# Allegro board RCTransponder-10.brd
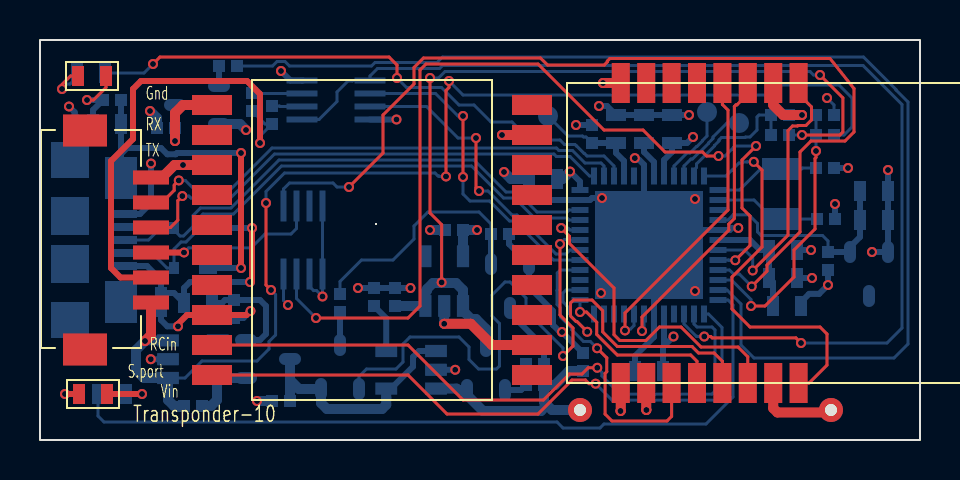
[diagram p0: board, top side]
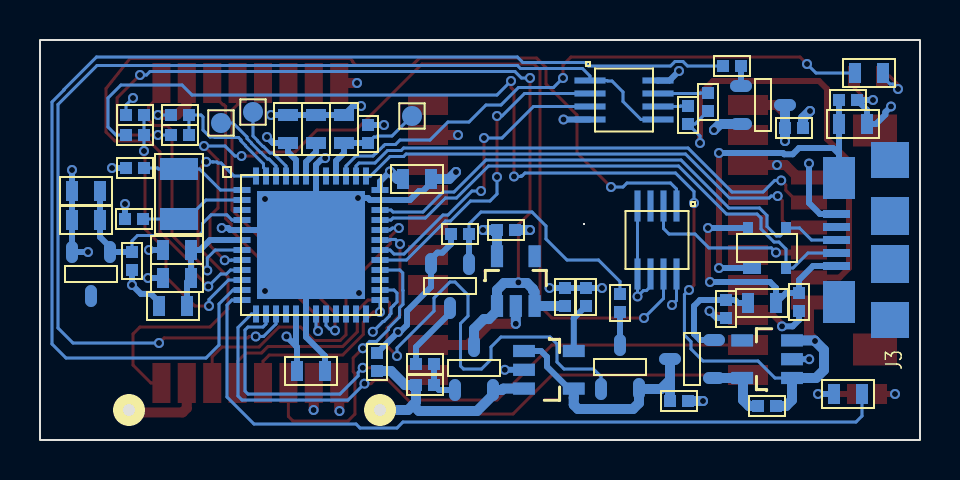
[diagram p1: board, bottom side, seen from below]

Outline 44 x 20 mm; copper layers: TOP, INNER_LAYER_2, INNER_LAYER_3, BOTTOM. Coordinates in mm from the lower left corner of the outline.
Outline path: rectangle 0,0 44,20

## Design rules (mm)
constraint set DEFAULT: min track width 0.15
net group DP1: nets USB_N USB_P

## Placement (name value [footprint] x y rotation side)
C1  1uF/10V  [R_0402]  12.05 1.95 0 bottom
C2  20pF  [R_0402]  39.25 13.6 0 bottom
C3  1uF/10V  [R_0402]  27.15 3.9 270 bottom
C4  10uF/6V3  [R_0402]  20.7 10.5 0 bottom
C5  20pF  [R_0402]  39.3 11.05 0 bottom
C6  10uF/6V3  [R_0402]  17.75 7.15 270 bottom
C7  100nF  [R_0603]  41.7 11 180 bottom
C8  4.7uF  [R_0603]  41.7 12.45 180 bottom
C9  100nF  [R_0603]  30.45 3.45 0 bottom
C10  100nF  [R_0603]  25.15 13.05 0 bottom
C11  100nF  [R_0603]  30.2 15.55 270 bottom
C12  100nF  [R_0603]  37.15 9.5 180 bottom
C13  4.7uF  [R_0603]  37.15 8.1 180 bottom
C14  100nF / 10V  [R_0402]  6.3 15.6 0 bottom
C15  1nF  [R_0402]  9.7 6.55 90 bottom
C16  1nF  [R_0402]  6.05 6.9 90 bottom
C17  100nF  [R_0603]  31.6 15.55 270 bottom
C18  100nF  [R_0603]  28.8 15.55 270 bottom
C19  4.7nF / 1kV  [R_0603]  3.35 15.8 0 bottom
D1  BAT54C  [R_SOT23_123]  11.4 4.05 180 bottom
D2  BAT54C  [R_SOT23_123]  15 3.65 270 bottom
D3  LM4040D30IDBZTG4  [R_SOT23]  41.45 8.3 90 bottom
D4  LSQ976-Z  [R_0603]  2.65 2.3 180 top
D5  PRTR5V0U2X  [R_SOT143B]  7.65 9.6 180 bottom
D7  VLMG1300-GS08  [R_0603]  2.6 18.2 0 top
FB1  470R@100MHz  [R_0603]  37.35 6.7 180 bottom
FB2  BLM18PG471SN1D  [R_0603]  7.9 6.85 0 bottom
J1  6x1_1.25mm DF13 connector  [R_CONN_DF13A-6P-1_25H]  2.85 10 90 top
J2  E28-2G4M20S  [R_RFE28-2G4M20S]  39.6 10.35 90 top
J3  ZX62-AB-5PA(31)  [R_USB-ZX62-AB-5PA_31_]  1.5 10 90 bottom
J4  PA6H  [R_GPS_PA6H]  16.6 10 0 top
Q1  RZR040P01  [R_SOT23]  22.3 3.6 270 bottom
Q2  NTR4003NT3G  [R_SOT23]  23.5 7.7 90 bottom
Q3  RZR040P01  [R_SOT23]  7.85 16.75 0 bottom
R1  N.M.  [R_0402]  7.65 1.7 0 bottom
R2  10k  [R_0402]  24.75 2.75 0 bottom
R3  20k  [R_0402]  16.7 7.15 270 bottom
R4  10k  [R_0402]  24.75 3.8 0 bottom
R5  10k  [R_0402]  15 6.85 90 bottom
R6  1k  [R_0402]  39.4 8.95 270 bottom
R7  10k  [R_0402]  23 10.3 0 bottom
R8  100k  [R_0402]  39.25 15.25 180 bottom
R9  100k  [R_0402]  37 15.25 180 bottom
R10  100k  [R_0402]  37 16.25 0 bottom
R11  100k  [R_0402]  39.25 16.25 0 bottom
R13  1k3  [R_0603]  3.6 2.3 180 bottom
R15  10k  [R_0402]  9.4 18.7 0 bottom
R16  10k  [R_0402]  27.6 15.3 90 bottom
R17  1M  [R_0402]  3.6 17 0 bottom
R18  1k  [R_0402]  10.6 16.9 270 bottom
R19  1k  [R_0402]  11.6 16.25 270 bottom
R20  1k3  [R_0603]  2.55 18.35 0 bottom
RESET  RESET  [R_1MM_TESTPOINT]  25.4 16.2 180 bottom
SWCLK  SWCLK  [R_1MM_TESTPOINT]  33.35 16.4 180 bottom
SWDIO  SWDIO  [R_1MM_TESTPOINT]  34.95 15.85 180 bottom
U1  MCP73812  [R_SOT23-5PIN]  19.8 4.45 270 bottom
U2  REG102NA-5  [R_SOT23-5PIN]  6.4 3.1 90 bottom
U3  MIC5504-3.3  [R_SOT23-5PIN]  21.15 6.7 180 bottom
U4  ATSAMD21G18A-48  [R_QFN48_7X7MM]  30.45 9.75 180 bottom
U6  SN74LVC2G86DCTR  [R_PDSO-G8]  13.15 10 270 bottom
U7  SN74LVC2G86DCTR  [R_PDSO-G8]  14.8 17 180 bottom
UNK+  Vbat+  [TESTPIN-0_6MM]  27 1.5 180 bottom
UNK-  Vbat-  [TESTPIN-0_6MM]  39.55 1.5 180 bottom
Y1  32.768kHz  [R_XTAL-ABS07]  37.05 12.3 90 bottom

## Library data of the parts
C1 C3 C4 C6-C14 C17-C19 = CAP NP_0: room: P25
C2 C5 C15 C16 = Cap 0402: room: ATMEL
D1 D2 = BAT54C: room: serial3
D3 = LM4040A41IDBZ_0
D4 D7 = LM4040A41IDBZ_1
D5 = TVS_SRV_1: room: USB
FB1 FB2 = FERRITE_chip_0: room: ATMEL
J1 = CON3_19: room: COMPORT
J2 = RJ11_30
J3 = USB_CON_3: room: USB
J4 = RJ11_22
Q1 Q3 = P_MOSFET_SOT223_1: room: PWR
Q2 = STB4NK60ZT4_2: room: POVP
R1-R11 R13 R15-R20 = R2: room: serial3
RESET SWCLK SWDIO UNK+ UNK- = TP_0
U1 = MIC4680_9: room: P25
U2 U3 = MIC4680_4: room: P25
U4 = AT91SAM4E-BGA144_6
U6 U7 = MIC4680_15: room: P25
Y1 = CRYSTAL/SM: room: ATMEL

## Footprints (pads in the part's own frame, mm; a bottom-side part is the same pattern mirrored in y, then rotated)
R_1MM_TESTPOINT
  round 1 smd: 1(0,0)
R_0402
  rect 0.6x0.6 smd: 1(-0.45,0) 2(0.45,0)
R_0603
  rect 0.6x1 smd: 1(-0.7,0) 2(0.7,0)
R_CONN_DF13A-6P-1_25H
  rect 0.7x1.8 smd: 1(-3.125,-2.7) 2(-1.875,-2.7) 3(-0.625,-2.7) 4(0.625,-2.7) 5(1.875,-2.7) 6(3.125,-2.7)
  rect 1.6x2.2 smd: 7(-5.475,0.6) 8(5.475,0.6)
R_GPS_PA6H
  round 0.1 hole 3: (0.2,0.8)
  rect 2x1 smd: 1(-8,6.75) 2(-8,5.25) 3(-8,3.75) 4(-8,2.25) 5(-8,0.75) 6(-8,-0.75) 7(-8,-2.25) 8(-8,-3.75) 9(-8,-5.25) 10(-8,-6.75) 11(8,-6.75) 12(8,-5.25) 13(8,-3.75) 14(8,-2.25) 15(8,-0.75) 16(8,0.75) 17(8,2.25) 18(8,3.75) 19(8,5.25) 20(8,6.75)
R_PDSO-G8
  rect 1.55x0.3 smd: 1(-1.7,0.975) 2(-1.7,0.325) 3(-1.7,-0.325) 4(-1.7,-0.975) 5(1.7,-0.975) 6(1.7,-0.325) 7(1.7,0.325) 8(1.7,0.975)
R_QFN48_7X7MM
  rect 0.85x0.3 smd: 1(-3.45,2.75) 2(-3.45,2.25) 3(-3.45,1.75) 4(-3.45,1.25) 5(-3.45,0.75) 6(-3.45,0.25) 7(-3.45,-0.25) 8(-3.45,-0.75) 9(-3.45,-1.25) 10(-3.45,-1.75) 11(-3.45,-2.25) 12(-3.45,-2.75) 25(3.45,-2.75) 26(3.45,-2.25) 27(3.45,-1.75) 28(3.45,-1.25) 29(3.45,-0.75) 30(3.45,-0.25) 31(3.45,0.25) 32(3.45,0.75) 33(3.45,1.25) 34(3.45,1.75) 35(3.45,2.25) 36(3.45,2.75)
  rect 0.3x0.85 smd: 13(-2.75,-3.45) 14(-2.25,-3.45) 15(-1.75,-3.45) 16(-1.25,-3.45) 17(-0.75,-3.45) 18(-0.25,-3.45) 19(0.25,-3.45) 20(0.75,-3.45) 21(1.25,-3.45) 22(1.75,-3.45) 23(2.25,-3.45) 24(2.75,-3.45) 37(2.75,3.45) 38(2.25,3.45) 39(1.75,3.45) 40(1.25,3.45) 41(0.75,3.45) 42(0.25,3.45) 43(-0.25,3.45) 44(-0.75,3.45) 45(-1.25,3.45) 46(-1.75,3.45) 47(-2.25,3.45) 48(-2.75,3.45)
  rect 5.4x5.4 smd: 49(0,0)
R_RFE28-2G4M20S
  rect 2x0.9 smd: 1(-7.5,10.56) 2(-7.5,9.29) 3(-7.5,8.02) 4(-7.5,6.75) 5(-7.5,5.48) 6(-7.5,4.21) 7(-7.5,2.94) 8(-7.5,1.67) 9(7.5,1.67) 10(7.5,2.94) 11(7.5,4.21) 12(7.5,5.48) 13(7.5,6.75) 14(7.5,8.02) 15(7.5,9.29) 16(7.5,10.56)
R_SOT23
  oval 1.1x0.6 smd: 1(1.1,-0.95) 2(1.1,0.95) 3(-1.1,0)
R_SOT23-5PIN
  rect 0.61x1.092 smd: 1(0,0) 2(0.94,0) 3(1.88,0) 4(1.88,2.489) 5(0,2.489)
R_SOT23_123
  oval 1.1x0.6 smd: 1(1.1,-0.95) 2(1.1,0.95) 3(-1.1,0)
R_SOT143B
  rect 0.9x0.6 smd: 1(-0.75,-1)
  rect 0.5x0.6 smd: 2(0.95,-1) 3(0.95,1) 4(-0.95,1)
R_USB-ZX62-AB-5PA_31_
  rect 0.4x1.35 smd: 1(-1.3,2.675) 2(-0.65,2.675) 3(0,2.675) 4(0.65,2.675) 5(1.3,2.675)
  rect 2.1x1.6 smd: 6(3.1,2.55) 7(-3.1,2.55)
  rect 1.9x1.9 smd: 8(1.2,0) 9(-1.2,0)
  rect 1.8x1.9 smd: 10(-4,0) 11(4,0)
R_XTAL-ABS07
  rect 1.1x1.9 smd: 1(-1.25,0) 2(1.25,0)
TESTPIN-0_6MM
  round 1.2 hole 0.6: 1(0,0)

## Nets
4V7: C1.2 D1.3 D2.2(C2) U1.1 U1.4(VDD)
+3.3V: C4.2 C9.2 C10.2 C17.2 FB1.1 J2.1(VCC) Q3.2(S) R6.2 R16.2 U3.5(VOUT) U4.17 U4.36(VDDIO2) U4.44 U6.8(VCC) U7.8(VCC)
GND: C1.1 C2.2 C3.1 C4.1 C5.2 C6.1 C7.1 C8.1 C9.1 C10.1 C11.1 C12.1 C13.1 C14.1 C15.1 C16.1 C17.1 C18.1 C19.1 D3.2 D4.2(CATHODE) D7.2(CATHODE) J1.6 J2.2 J2.7 J2.10 J2.16 J3.5 J4.3 J4.8 J4.12 J4.19 Q2.2(S) R3.1 R7.2 R10.2 R11.2 R17.1 U1.2 U2.2 U3.2 U4.5 U4.18 U4.35 U4.42 U4.49 U6.4 U6.5 U6.6 U7.4 UNK-.1
VIN: J1.1 R1.1 R8.1 U2.1 U2.3
VIN_50P: R8.2 R11.1 U4.10
AUX_RX: J1.5 U4.38
AUX_TX: J1.4 U4.37
BUSY: J2.12 U4.20
FRSKY_INVERT: U4.15 U7.1 U7.5
FRSKY_RCIN: J1.3 U6.2
FRSKY_SMART_PORT: J1.2 R18.2 R19.2
FRSKY_SMART_PORT_RX: U4.30 U7.3
FRSKY_SMART_PORT_TX: U4.29 U7.2
GPS_RX: J4.10 U4.13
GPS_TX: J4.9 U4.14
LED1: R20.2 U4.39
LED2: R13.2 U4.12
MISO: J2.3 U4.28
MOSI: J2.4 U4.25
NRESET: J2.11 U4.19
NSS: J2.6 U4.32
POWER_GPS: R15.2 U4.11
POWER_ON: D2.1 U4.31
RCIN: U4.8 U6.7
RESET: C18.2 R16.1 RESET.1 U4.40
RX_EN: J2.8 U4.48
SBUS_INVERT: U4.9 U6.1
SCK: J2.5 U4.26
TX_EN: J2.9 U4.7
USB_N: D5.2 J3.2 U4.33
USB_P: D5.3 J3.3 U4.34
VGPS: C14.2 J4.1(VCC) Q3.3
VLION: C6.2 Q1.3 R9.1 U3.1 U3.3
VREFA: C7.2 C8.2 D3.1(CATHODE) R6.1 U4.4
VUSB: C15.2 D1.2(C2) FB2.2
XIN32: C2.1 U4.1 Y1.2
XOUT32: C5.1 U4.2 Y1.1
N17065478: C11.2 U4.43
N17065885: C12.2 C13.2 FB1.2 U4.6
N17069937: C16.2 D5.4(VCC) FB2.1 J3.1(VBUS)
N17070561: C19.2 D5.1 J3.6 R17.2
N17071719: C3.2 Q1.2(S) R2.2 U1.3 UNK+.1
N17071775: R3.2 U1.5
N17071786: Q1.1 R2.1 R4.1
N17071891: D2.3 R5.1
N17071893: Q2.1 R5.2 R7.1
N17073887: D1.1 R1.2 U2.5(VOUT)
N17081259: Q3.1 R15.1
N17089733: R9.2 R10.1 U4.47
N17092983: D4.1 R13.1
N17093743: SWDIO.1 U4.46
N17093750: SWCLK.1 U4.45
N17097944: R18.1 U7.7
N17097957: R19.1 U7.6
N17102064: D7.1 R20.1
N170718061: Q2.3 R4.2

Pads without a net: D3 3; J1 7 8; J2 13 14 15; J3 4 7 8 9 10 11; J4 2 4 5 6 7 11 13 14 15 16 17 18 20; U2 4; U3 4; U4 3 16 21 22 23 24 27 41; U6 3

## Via types
v1: diameter 0.5, hole 0.3, TOP to BOTTOM, 96 vias

## Routing (per net, layer and track width the routed paths; a pad name or vN(x,y) marks a point on that pad's centre or on a via; arc(x,y) is an arc through that point)
4V7: length 12.4
  BOTTOM w0.3: U1.4 17.55,2.57 18.65,3.67 18.65,4.15 18.95,4.45 U1.1
  BOTTOM w0.5: 12.5,3 C1.2 ; 12.5,3 12.95,2.55 D2.2 14.05,1.85 14.35,1.55 17.1,1.55 17.31,1.76 17.31,2.11 17.31,2.12 U1.4 ; 12.5,3 D1.3
+3.3V: length 19.8
  TOP w0.3: 29.04,2.9 J2.1
  TOP w0.5: J2.1 29.04,1.47 v1(29.02,1.45)
  BOTTOM w0.15: v1(12.4,6.75) 12.18,6.97 U6.8
  BOTTOM w0.3: v1(12.05,18.45) 12.53,17.98 U7.8 13.15,17.98 ; R16.2 v1(26.8,15.75) ; 31.2,4.7 U4.17 ; 31.2,4.7 v1(31.68,5.17) ; 31.2,4.7 31.15,4.65 C9.2 ; FB1.1 38.05,6.9 38.46,7.31 38.96,7.31 v1(39.4,7.75) R6.2 ; U4.44 31.2,14 31.6,14.4 C17.2 32.35,14.85 v1(32.65,15.15) ; v1(26.5,13.42) 27,12.92 U4.36
  BOTTOM w0.5: v1(26.5,13.42) 26.13,13.05 C10.2 ; U3.5 C4.2 v1(21.85,10.5) ; Q3.2 10,15.8 v1(10.3,15.5)
GND: length 95.9
  TOP w0.15: v1(2.35,17) 2.67,17 3.3,17.62 D7.2
  TOP w0.3: 30.31,2.9 J2.2 ; v1(10.53,6.45) 10.32,6.25 J4.8 7.35,6.25 6.9,5.8 v1(6.9,5.68) ; 36.66,17.9 J2.10 ; D4.2 v1(1.25,2.3) ; 28.2,17.9 v1(28.15,17.85) ; 36.66,2.9 J2.7
  TOP w0.5: J4.19 v1(23.1,15.25) ; J2.10 36.66,16.75 37.16,16.25 v1(38.1,16.25) ; J4.3 v1(7.15,13.75) 6.72,13.75 6.1,13.12 J1.6 ; J4.12 22.6,4.75 21.54,5.81 v1(20.21,5.81) ; J2.2 30.31,1.51 v1(30.32,1.5) ; v1(28.15,17.85) J2.16 ; J2.7 36.66,1.59 36.87,1.38 39.43,1.38 UNK-.1
  INNER_LAYER_2 w0.25: UNK-.1 39.55,2.3 ; UNK-.1 38.75,1.5 ; UNK-.1 40.35,1.5 ; UNK-.1 39.55,0.7
  BOTTOM w0.15: v1(38.1,16.25) R10.2 ; U6.4 U6.5 v1(14.12,7.17) 13.83,7.47 13.68,7.47 13.47,7.67 U6.6 ; R11.2 39.7,16.75 v1(39.35,17.1)
  BOTTOM w0.3: v1(10.53,6.45) 10.18,6.1 C15.1 ; v1(32.45,16.25) C17.1 C11.1 C18.1 28.35,16.7 v1(27.95,16.7) ; J3.5 5,11.3 5.55,11.85 v1(5.55,13.82) ; v1(2.35,17) R17.1 2.65,16.5 C19.1 2.2,15.8 1.73,16.27 1.73,16.39 v1(1.45,16.68) ; C5.2 v1(39.75,11.8) ; U1.2 v1(20.76,3.51) ; C2.2 v1(40.4,13.6) ; 30.2,11.45 U4.42 30.2,13.76 29.96,14 29.84,14 v1(29.74,14.09) ; v1(6.9,5.68) 6.37,5.68 6.05,6 C16.1 ; v1(42.4,13.5) C8.1 C7.1 D3.2 v1(41.6,9.4) ; C10.1 24.45,12.85 24.86,12.44 25.06,12.44 25.5,12 U4.35 27.5,12 27.6,12.1 v1(28.1,12.1) ; U7.4 v1(17.82,16.02) ; C13.1 v1(38.6,8.1) ; v1(15.9,7.6) R3.1 C6.1 v1(18.52,7.6) ; R7.2 23.45,9.8 23.88,9.37 24.13,9.37 24.45,9.05 Q2.2 24.45,7.65 25.65,6.45 25.65,5.75 25.95,5.45 26.05,5.45 v1(26.1,5.4) C3.1 27.2,4.3 ; C12.1 v1(38.55,9.5) ; C9.1 29.75,4.2 30.7,5.15 U4.18 30.7,9.5 U4.49 31.2,10.5 U4.5 34.49,10.5 34.59,10.6 v1(34.91,10.6) ; U2.2 v1(5.54,4.04)
  BOTTOM w0.5: C10.1 23.55,13.05 v1(23.2,13.4) ; C4.1 v1(19.5,10.5) ; U3.2 v1(20.21,5.81) ; C1.1 v1(10.85,1.95) ; v1(5.5,16.45) 5.85,16.1 C14.1
  vias: v1(28.05,7.35) v1(32.75,12.05) v1(32.75,7.45)
VIN: length 60.2
  TOP w0.15: v1(11.55,7.5) 11.3,7.75 v1(11.3,11.85) ; v1(20.45,17.95) 20.45,17.62 20.3,17.48 v1(20.3,13.18)
  TOP w0.5: v1(5.25,4.95) 5.55,5.25 J1.1
  BOTTOM w0.15: R8.1 40.2,15.25 40.6,15.65 40.6,17.1 39.95,17.75 36.9,17.75 36.4,17.25 21.15,17.25 v1(20.45,17.95) ; U2.1 7.25,3.1 8.1,3.95 10.85,3.95 11.45,4.55 11.45,4.92 11.78,5.25 11.78,7.27 v1(11.55,7.5) ; v1(20.3,13.18) 19.98,13.18 19.95,13.2 19.9,13.2 19.75,13.35 12.22,13.35 11.3,12.43 v1(11.3,11.85)
  BOTTOM w0.5: R1.1 6.7,1.7 6.4,2 U2.1 5.2,3.1 4.8,3.5 4.8,4.5 v1(5.25,4.95) 5.28,4.98 U2.3
VIN_50P: length 13.7
  TOP w0.15: v1(35.55,6.7) 36.25,6.7 37.7,8.15 37.7,9.5 38.75,10.55 38.75,14.07 38.8,14.12 v1(38.8,14.45)
  BOTTOM w0.15: v1(35.55,6.7) 35.55,7.03 34.58,8 U4.10 ; R11.1 R8.2 v1(38.8,14.45)
AUX_RX: length 25.3
  TOP w0.15: v1(6.94,12.98) 6.71,12.75 6.71,12.48 6.1,11.88 J1.5
  BOTTOM w0.15: U4.38 28.2,13.7 28.05,13.85 27.25,13.85 26.62,14.47 25.94,14.47 25.82,14.6 11.6,14.6 9.4,12.4 7.84,12.4 7.26,12.98 v1(6.94,12.98)
AUX_TX: length 24.8
  TOP w0.15: v1(7.12,12.2) 6.89,11.97 6.89,10.99 6.53,10.62 J1.4
  BOTTOM w0.15: U4.37 27.48,13.2 26.5,14.18 25.82,14.18 25.7,14.3 11.72,14.3 9.52,12.1 7.54,12.1 7.44,12.2 v1(7.12,12.2)
BUSY: length 15.8
  TOP w0.15: v1(29.25,5.47) 29.25,6.35 34.4,11.5 34.4,16.5 34.12,16.77 J2.12 34.12,17.9
  BOTTOM w0.15: U4.20 29.7,5.72 29.53,5.55 29.32,5.55 v1(29.25,5.47)
FRSKY_INVERT: length 55.6
  TOP w0.15: v1(33.21,5.17) 33.54,5.17 33.61,5.11 37.79,5.11 v1(38.05,4.85)
  BOTTOM w0.15: U7.5 13.95,16.02 14.85,16.93 14.85,17.4 15.4,17.95 15.62,17.95 15.65,17.98 U7.1 16.5,18.2 16.88,18.57 19.98,18.57 20.13,18.73 41.15,18.73 43.1,16.78 43.1,5.6 42.35,4.85 v1(38.05,4.85) ; U4.15 32.2,5.8 32.82,5.18 32.88,5.18 32.89,5.17 v1(33.21,5.17)
FRSKY_RCIN: length 8.9
  TOP w0.3: v1(7.2,9.38) J1.3
  BOTTOM w0.15: v1(7.2,9.38) 7.43,9.6 10.55,9.6 11.25,10.3 12.55,10.3 12.82,10.57 12.82,11.7
FRSKY_SMART_PORT: length 23.3
  TOP w0.3: J1.2 4.03,8.12 3.55,8.6 3.55,13.95 4.65,15.05 4.65,17.55 5.05,17.95 10.35,17.95 11,17.3 v1(11,14.85)
  BOTTOM w0.15: v1(11,14.85) 11,15.2 R19.2 11.25,15.8 R18.2
FRSKY_SMART_PORT_RX: length 15.1
  TOP w0.15: v1(21.8,15.1) 21.8,12.6 v1(21.95,12.45)
  BOTTOM w0.15: U7.3 19.32,16.68 20.9,15.1 v1(21.8,15.1) ; U4.30 26.5,9.5 26.3,9.3 25.8,9.3 23.85,11.25 23.6,11.25 22.4,12.45 v1(21.95,12.45)
FRSKY_SMART_PORT_TX: length 16.2
  TOP w0.15: v1(21.15,13.15) v1(21.15,16.2)
  BOTTOM w0.15: U4.29 25.68,9 23.73,10.95 23.48,10.95 22.48,11.95 21.5,11.95 21.15,12.3 v1(21.15,13.15) ; v1(21.15,16.2) 20.9,16.2 19.77,17.32 U7.2
GPS_RX: length 32.1
  TOP w0.15: J4.10 18.4,3.25 20.35,1.3 24.9,1.3 26.6,3 27.27,3 27.45,2.82 v1(27.78,2.82)
  BOTTOM w0.15: v1(27.78,2.82) 28.6,2 33.9,2 34.1,2.2 34.1,5.62 33.42,6.3 U4.13
GPS_TX: length 32.4
  TOP w0.15: J4.9 18.4,4.75 21.15,2 25.17,2 26.47,3.3 27.1,3.3 27.41,3.61 v1(27.86,3.61)
  BOTTOM w0.15: U4.14 32.7,5.8 32.85,5.65 33.6,5.65 33.75,5.5 33.75,2.44 33.6,2.29 29,2.29 28.09,3.21 28.09,3.38 v1(27.86,3.61)
LED1: length 28.9
  TOP w0.15: v1(17.85,18.1) 17.85,18.75 17.45,19.15 6,19.15 v1(5.65,18.8)
  BOTTOM w0.15: v1(17.85,18.1) 18.32,17.62 20.07,17.62 20.95,16.75 21.7,16.75 22.55,15.9 23.6,15.9 24.5,15 26,15 26.23,14.78 26.75,14.78 26.82,14.7 26.83,14.7 27.21,14.32 27.23,14.32 27.35,14.2 28.2,14.2 28.7,13.7 U4.39 ; v1(5.65,18.8) 5.2,18.35 R20.2
LED2: length 39.2
  BOTTOM w0.15: U4.12 34.4,7 34.65,6.75 34.65,2.15 33.3,0.8 28.2,0.8 28,0.6 26.15,0.6 25.85,0.9 3.2,0.9 2.9,1.2 R13.2
MISO: length 14.8
  TOP w0.15: v1(27.86,4.59) 28.34,4.1 28.34,3.41 28.25,3.33 28.25,1.3 28.6,0.95 31.35,0.95 31.58,1.18 J2.3
  BOTTOM w0.15: U4.28 26.01,8.5 25.86,8.35 25.86,7.49 25.85,7.47 25.85,6.78 26.02,6.61 26.02,6.15 26.57,5.6 26.57,5.53 27.17,4.93 27.51,4.93 v1(27.86,4.59)
MOSI: length 8.9
  TOP w0.15: J2.4 32.85,3.94 32.53,4.25 28.87,4.25 27.84,5.28 27.84,5.89 27.32,6.4 v1(27,6.4)
  BOTTOM w0.15: v1(27,6.4) U4.25
NRESET: length 15.6
  TOP w0.15: v1(30.1,5.45) 30.1,6.15 34.44,10.49 34.44,10.8 34.72,11.07 34.72,16.68 34.8,16.76 34.85,16.76 35.39,17.3 J2.11 35.39,17.9
  BOTTOM w0.15: U4.19 30.2,5.55 v1(30.1,5.45)
NSS: length 16.4
  TOP w0.15: v1(26.06,10.6) 26.48,10.18 26.48,9.82 28.7,7.6 28.7,5.26 28.99,4.97 30.3,4.97 30.97,5.65 32.05,5.65 33.05,4.65 34.9,4.65 35.39,4.16 J2.6
  BOTTOM w0.15: v1(26.06,10.6) 26.38,10.6 26.43,10.55 26.45,10.55 26.5,10.5 U4.32
POWER_GPS: length 59.4
  BOTTOM w0.15: R15.2 11.63,18.7 11.85,18.93 12.25,18.93 12.47,18.7 16.58,18.7 16.75,18.88 19.85,18.88 20.13,19.15 41.17,19.15 42.8,17.52 42.8,17.5 43.4,16.9 43.4,4.8 42.7,4.1 35.7,4.1 35.05,4.75 35.05,6.8 34.35,7.5 U4.11
POWER_ON: length 26.9
  TOP w0.15: v1(26.15,4.2) 26.65,4.7 26.65,5.6 26,6.25 v1(26,9.8)
  BOTTOM w0.15: D2.1 15.95,3.17 16.32,3.55 17.8,3.55 18.15,3.9 18.15,4.8 18.5,5.15 20.95,5.15 21.45,4.65 21.45,4.03 21.93,3.55 22.82,3.55 22.98,3.7 22.98,5.83 22.6,6.2 22.6,7.25 23.25,7.9 23.5,7.9 24.3,7.1 24.3,6.45 26.15,4.6 v1(26.15,4.2) ; v1(26,9.8) 26.23,10.03 26.47,10.03 26.5,10 U4.31
RCIN: length 46.2
  TOP w0.15: v1(35.8,14.7) 35.1,14 35.1,11.6 35.5,11.2 35.5,9.72 v1(34.76,8.99) ; v1(13.8,6.1) 18.4,6.1 19,6.7 19,18.5 19.3,18.8 24.9,18.8 28.2,15.5 30.15,15.5 31.25,14.4 33.12,14.4 33.33,14.2 v1(33.92,14.2)
  BOTTOM w0.15: 12.82,8.3 12.82,7.08 v1(13.8,6.1) ; v1(34.76,8.99) 34.44,8.99 34.42,9 U4.8 ; v1(33.92,14.2) 34.25,14.2 34.75,14.7 v1(35.8,14.7)
RESET: length 5.8
  BOTTOM w0.15: RESET.1 26.4,15.2 27.13,15.2 27.18,15.15 27.3,15.15 R16.1
  BOTTOM w0.3: U4.40 29.2,13.95 28.8,14.35 C18.2 R16.1
RX_EN: length 19.5
  TOP w0.15: J2.8 38.45,2.85 39.35,3.75 39.35,5.3 39,5.65 35.5,5.65 34.6,6.55 34.6,8.15 36.1,9.65 36.1,13.5 v1(35.69,13.91)
  BOTTOM w0.15: U4.48 34.3,13.2 34.95,13.85 35.1,13.85 35.16,13.9 35.36,13.9 35.36,13.91 v1(35.69,13.91)
SBUS_INVERT: length 49.9
  TOP w0.15: v1(15.45,12.65) 17.15,14.35 17.15,16.25 18.7,17.8 18.7,18.62 19.18,19.1 25.02,19.1 25.37,18.75 28.21,18.75 28.36,18.9 28.36,18.94 28.5,19.07 39.5,19.07 40.7,17.57 40.7,15.4 40.25,14.95 38.55,14.95 38,14.4 38,10.4 36.35,8.75 36.35,8.44 v1(35.59,7.68)
  BOTTOM w0.15: U6.1 12.18,12.55 12.47,12.85 14.65,12.85 14.85,12.65 v1(15.45,12.65) ; v1(35.59,7.68) 34.96,8.3 34.68,8.3 34.48,8.5 U4.9
SCK: length 15.8
  TOP w0.15: J2.5 34.12,3.94 33.7,4.35 32.93,4.35 32.6,4.67 28.86,4.67 28.14,5.4 28.14,6.46 27.6,7 26.68,7 26.52,6.85 26.52,6.2 26.8,5.92 26.85,5.92 v1(27.36,5.41)
  BOTTOM w0.15: U4.26 26.3,7.5 26.15,7.35 26.15,6.9 26.32,6.73 26.32,6.72 26.45,6.6 26.45,6.32 26.52,6.25 26.52,6.2 26.8,5.92 26.85,5.92 v1(27.36,5.41)
TX_EN: length 13.8
  TOP w0.15: J2.9 37.93,17.3 38.58,16.66 38.58,16 38.3,15.72 37.9,15.72 37.88,15.7 37.63,15.7 37.4,15.47 37.4,10.24 v1(35.64,8.48)
  BOTTOM w0.15: v1(35.64,8.48) 35.64,9.1 35.24,9.5 U4.7
USB_N: length 27.2
  BOTTOM w0.15: J3.2 5.6,9.35 6.35,8.6 D5.2 6.7,9.55 7.05,9.9 7.3,9.9 7.95,10.55 7.95,11.1 8.15,11.3 9.67,11.3 12.07,13.7 21.58,13.7 23.18,12.1 23.73,12.1 24.73,11.1 26.35,11.1 26.45,11 U4.33
USB_P: length 26.3
  BOTTOM w0.15: U4.34 26.45,11.5 26.35,11.4 24.85,11.4 23.85,12.4 23.3,12.4 21.7,14 11.95,14 9.55,11.6 8.03,11.6 7.65,11.22 7.65,10.67 7.18,10.2 7,10.2 6.7,10.5 D5.3 6.03,10.6 5.42,10 J3.3
VGPS: length 5.2
  TOP w0.5: J4.1 7.15,16.75 6.75,16.35 v1(6.75,14.95)
  BOTTOM w0.5: Q3.3 C14.2 v1(6.75,14.95)
VLION: length 44.2
  TOP w0.15: v1(38.1,15.25) 39.99,15.25 40.14,15.4 40.14,17.11 v1(39,18.25) ; v1(19.5,18.1) 19.5,11.35 20.08,10.77 v1(20.08,7.88)
  BOTTOM w0.15: 20.08,7.85 v1(20.08,7.88) ; v1(39,18.25) 38.67,18.25 38.5,18.43 20.25,18.43 19.93,18.1 v1(19.5,18.1) ; v1(38.1,15.25) R9.1
  BOTTOM w0.5: Q1.3 22.3,5.55 21.8,6.05 21.56,6.05 21.15,6.46 U3.1 21.15,7.5 20.8,7.85 19.65,7.85 19.35,7.55 19.35,7.48 19.27,7.4 U3.3 C6.2
VREFA: length 11.3
  BOTTOM w0.15: U4.4 34.4,11 34.66,11.26 35.44,11.26 35.88,10.82 35.88,10.41 36.06,10.22 39.12,10.22 39.4,9.95 R6.1
  BOTTOM w0.3: R6.1 D3.1 40.5,9.65 41,10.15 C7.2 C8.2
VUSB: length 5.4
  BOTTOM w0.3: FB2.2 9.1,6.85 9.25,7 C15.2 11,7 11.3,6.7 11.3,5.3 11,5 D1.2
XIN32: length 5.4
  BOTTOM w0.15: C2.1 38.12,13.6 38.08,13.55 Y1.2 36.02,13.55 34.98,12.5 U4.1
XOUT32: length 5.3
  BOTTOM w0.15: C5.1 Y1.1 36.65,11.05 35.7,12 U4.2
N17065478: length 1.9
  BOTTOM w0.3: C11.2 30.2,14.4 30.7,13.9 U4.43
N17065885: length 5.6
  BOTTOM w0.3: U4.6 35.5,10 36,9.5 C12.2 C13.2 36.65,7.9 FB1.2
N17069937: length 13.1
  TOP w0.3: v1(10.5,7.9) 10.6,8 v1(10.6,10.6)
  BOTTOM w0.3: v1(10.5,7.9) 7.5,7.9 7.2,7.6 FB2.1 6.7,7.35 C16.2 6.05,8 5.35,8.7 J3.1 ; D5.4 v1(10.6,10.6)
N17070561: length 17.6
  TOP w0.3: v1(10.05,14.35) v1(10.05,8.6)
  BOTTOM w0.3: 4.05,14.3 4.35,14.6 6.05,14.6 6.36,14.29 6.79,14.29 6.85,14.35 v1(10.05,14.35) ; 4.05,14.3 C19.2 R17.2 ; 4.05,14.3 J3.6 ; D5.1 v1(10.05,8.6)
N17071719: length 11.3
  BOTTOM w0.5: 25.35,1.75 25.2,1.9 R2.2 25.75,2.75 26.45,3.45 C3.2 ; 25.35,1.75 25.6,1.5 UNK+.1 ; 25.35,1.75 25.05,1.45 22.15,1.45 21.35,2.25 Q1.2 20.9,2.5 20.83,2.57 U1.3
N17071775: length 2.5
  BOTTOM w0.3: U1.5 17.31,6.09 R3.2
N17071786: length 2.2
  BOTTOM w0.3: R4.1 R2.1 24.05,2.5 Q1.1
N17071891: length 1.7
  BOTTOM w0.3: R5.1 D2.3
N17071893: length 12.2
  BOTTOM w0.15: R7.1 22.55,10.8 21.95,11.4 19.4,11.4 18.7,10.7 18.7,10.05 17.65,9 16.07,9 15,7.92 R5.2
  BOTTOM w0.3: R7.1 Q2.1
N17073887: length 3.4
  BOTTOM w0.5: R1.2 8.55,1.7 8.85,2 8.85,3.06 U2.5 D1.1
N17081259: length 1
  BOTTOM w0.3: Q3.1 R15.1
N17089733: length 6.8
  BOTTOM w0.15: R9.2 R10.1 35.95,16.25 35.85,16.15 35.85,15.5 35.5,15.15 35.28,15.15 35.25,15.12 34.08,15.12 33.95,15 33.95,14.95 33.73,14.73 33.73,14.7 32.83,13.8 32.83,13.62 32.7,13.5 U4.47
N17092983: length 2.5
  TOP w0.3: D4.1 v1(5.1,2.3)
  BOTTOM w0.3: v1(5.1,2.3) R13.1
N17093743: length 4.2
  BOTTOM w0.15: SWDIO.1 34.35,15.85 33.65,15.15 33.65,15.08 33.42,14.85 33.42,14.83 32.97,14.38 32.95,14.38 32.62,14.05 32.55,14.05 32.2,13.7 U4.46
N17093750: length 4
  BOTTOM w0.15: U4.45 31.7,13.7 32.35,14.35 32.5,14.35 32.83,14.68 32.85,14.68 33.12,14.95 33.12,14.97 33.35,15.2 SWCLK.1
N17097944: length 2.6
  BOTTOM w0.15: R18.1 10.97,17.35 11,17.32 U7.7 13.15,17.32
N17097957: length 1.6
  BOTTOM w0.15: 13.15,16.68 U7.6 12,16.68 11.97,16.7 R19.1
N17102064: length 2.4
  TOP w0.15: D7.1 1.52,18.2 1.1,17.77 v1(1.1,17.55)
  BOTTOM w0.15: v1(1.1,17.55) 1.35,17.8 1.5,17.8 1.85,18.15 R20.1
N170718061: length 3.5
  BOTTOM w0.3: R4.2 25.2,4.65 23.5,6.35 Q2.3

## Copper pours and planes (outline as drawn; the poured copper is in the pictures)
+3.3V on INNER_LAYER_3: 44.05,20.05 44.05,-0.2 0.05,-0.2 0.05,20.05
GND on INNER_LAYER_2: 44.3,20.4 44.3,-0.45 -0.5,-0.45 -0.5,20.4

## Text on the board
Ref Des/Silkscreen Top: S.port | Gnd | RX | TX | RCin | Vin | Transponder-10
User.11: FIGURE | FINISHED_SIZE | 0.3 | 0.6 | 3.0 | DRILL CHART: TOP to BOTTOM | ALL UNITS ARE IN MILLIMETERS | TOLERANCE_DRILL | +0.05/-0.05 | +0.08/-0.08 | +0.1/-0.1 | PLATED | QTY | 96 | 2 | 1
